# Altium PCB PCB.PcbDoc
Units mm, origin at the board's own origin, x right, y up, seen from the top; angles counter-clockwise.
Board outline 7.24 x 6.35 mm, 2 copper layers (Top Layer, Bottom Layer); 9 components, 8 nets, 33 pads, 0 vias.
Unrouted connection lines stored in the file: 12.
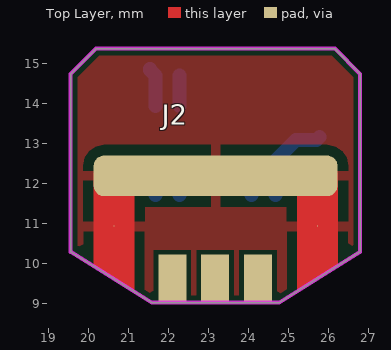
[diagram p0: Top Layer view]
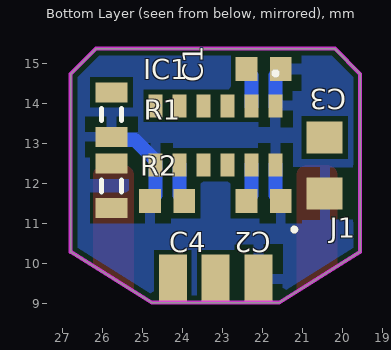
[diagram p1: Bottom Layer view, seen from below]

## Layer stack, top to bottom
Top Solder: solder mask 0.0102, Solder Resist, Dk 3.5
Top Layer: signal copper 0.0356
Dielectric 1: dielectric 0.32, FR-4, Dk 4.8
Bottom Layer: signal copper 0.0356
Bottom Solder: solder mask 0.0102, Solder Resist, Dk 3.5

## Board outline
19.558,10.287 19.558,14.732 20.193,15.367 26.162,15.367 26.797,14.732 26.797,10.287 24.765,9.017 21.59,9.017

## Design rules (kind name [scope] priority, off if disabled: settings)
Clearance [All] p1: gap=0.127 ignorepadtopadclearanceinfootprint=FALSE
PolygonConnect PolygonConnect_3 [All vs IsNamedPolygon('GND_L01_P002')] p1: connectstyle=Relief reliefconductorwidth=0.254 reliefentries=4 polygonreliefangle="90 Angle" airgapwidth=0.254
PolygonConnect PolygonConnect_2 [All vs IsNamedPolygon('GND_L01_P002')] p2: connectstyle=Relief reliefconductorwidth=0.254 reliefentries=4 polygonreliefangle="90 Angle" airgapwidth=0.254
PolygonConnect PolygonConnect_1 [All vs IsNamedPolygon('GND_L01_P002')] p3: connectstyle=Direct reliefconductorwidth=0.254 reliefentries=4 polygonreliefangle="90 Angle" airgapwidth=0.254
PolygonConnect [All] p4: connectstyle=Relief reliefconductorwidth=0.254 reliefentries=4 polygonreliefangle="90 Angle" airgapwidth=0.254
RoutingVias [All] p1: holewidth=0.711 width=1.27 viastyle="Through Hole" minholewidth=0.711 minwidth=1.27 maxholewidth=0.711 maxwidth=1.27
SolderMaskExpansion [All] p1: expansion=0.102 istentingtop=FALSE
SupplyNets "Schematic Supply Nets_1" [InNet('+3V3')] p1: voltage=0.000
SupplyNets "Schematic Supply Nets" [InNet('GND')] p2: voltage=0.000
Width [All] p1: maxlimit=16 minlimit=0.1 preferedwidth=0.254
30 further rules are at their usual default settings.

## Components (designator, comment, footprint, x,y, rotation, side; value= is the part's Value field where it differs from the comment)
C1 "Cap0402" CAP0402 21.971,14.859 r180 bottom value=100nF
C2 "Cap0402" CAP0402 21.971,11.557 r180 bottom value=100nF
C3 "Cap0603" CAP0603 20.447,12.446 r270 bottom value=1uF
C4 "Cap0402" CAP0402 24.384,11.557 r180 bottom value=100nF
IC1 "TMF8806" TMF88051B 23.176,13.2 r0 bottom locked
J1 "TOF_conn" PCBCOMPONENT_1 35.307,11.522 r180 bottom locked
J2 "FC_Mount" FC_MOUNT 20.414,7.881 r0 top
R1 "Res0402" RES0402 25.781,13.716 r90 bottom value=0R
R2 "Res0402" RES0402 25.781,11.938 r90 bottom value=10k

## Footprints (in the part's own frame and the unit in brackets; to place one, negate y for a bottom-side part, rotate by r counter-clockwise, add the part's x,y. Pads: shape width x height; smd on the part's side, far side on the other; paste and mask are expansions set on the pad)
CAP0402 [mm]
  rect 0.54x0.6 smd: 1(-0.43,0) 2(0.43,0)
  body extent -0.5,-0.28 0.5,0.27, height 0.5
CAP0603 [mm]
  rect 0.8x0.9 smd: 1(-0.7,0) 2(0.7,0)
  body extent -0.87,-0.48 0.87,0.48, height 0.55
FC_MOUNT [mil]
  round 1 smd: 1(8.97,120) 1(209.13,120)
  rrect50% 240x40 smd: 1(108.98,169.55)
  Top Layer region: 189.13,56.35 229.13,81.2 229.13,170 228.37,173.83 226.2,177.07 222.96,179.24 219.13,180 219.13,180 199.13,180 195.31,179.24 192.06,177.07 189.9,173.83 189.13,170 189.13,170
  Top Layer region: 28.97,56.35 -11.03,81.2 -11.03,170 -10.27,173.83 -8.11,177.07 -4.86,179.24 -1.03,180 -1.03,180 18.97,180 22.79,179.24 26.04,177.07 28.2,173.83 28.97,170 28.97,170
  body extent -3,-15 222,185, height 28
PCBCOMPONENT_1 [mm]
  rect 0.7x1.2 smd: 1(13.208,-1.903) 2(12.136,-1.903) 3(11.065,-1.903)
  rect 0.7x1.2 smd far side: 4(11.065,-1.903) 5(12.136,-1.903) 6(13.208,-1.903)
  silkscreen extent 14.05,-0.72 14.15,-0.63
RES0402 [mm]
  rect 0.5x0.8 smd: 1(-0.555,-0.005) 2(0.559,-0.005)
  silkscreen extent -0.15,-0.25 0.15,0.25, body extent -0.5,-0.25 0.5,0.25, height 0.4
TMF88051B [mm]
  rect 0.35x0.575 smd: 1(-1.5,-0.738) 2(-0.9,-0.738) 3(-0.3,-0.738) 4(0.3,-0.738) 5(0.9,-0.738) 6(1.5,-0.738) 7(1.5,0.738) 8(0.9,0.738) 9(0.3,0.738) 10(-0.3,0.738) 11(-0.9,0.738) 12(-1.5,0.738)
  silkscreen extent -1.55,-1.6 -1.45,-1.5, body extent -1.8,-1.1 1.8,1.1, height 1.2

## Part data
C1 C2 C4: Voltage=6V3
C3: Voltage=25V
IC1: library part TMF8805-1B, "Integrated Circuit", Manufacturer_Name="ams OSRAM", Mouser Part Number=985-TMF8805-1B, Datasheet Link=https://ams.com/documents/20143/4372629/TMF8805_DS000692_4-00.pdf, Height=1.1mm, Manufacturer_Part_Number=TMF8805-1B, Mouser Price/Stock=https://www.mouser.co.uk/ProductDetail/ams-OSRAM/TMF8805-1B?qs=sPbYRqrBIVlwsjHE%2F%252BrL9g%3D%3D

## Nets (pads, with @x,y where several pads share a name; then routed paths per layer and width w, separated by ;. In a path a pad name is that pad's centre, name@x,y a point inside that pad or via, vN(x,y) a via of type N, cw(c..) or ccw(c..) an arc to the next point about the centre after c; other vN are vias at no path point)
+3V3: C1.2 C2.2 C3.2 C4.1 IC1.1 IC1.7 IC1.12 J1.1 R1.1 | length 3.9
  Bottom Layer w0.35: C1.2 21.541,14.829 21.676,14.694 IC1.1 ; C2.2@21.676,11.706 IC1.12 ; C4.1@24.676,11.706 IC1.7 24.676,12.574 25.187,13.086 25.701,13.086 R1.1
EN: IC1.9 J1.6
GND: C1.1 C2.1 C3.1 C4.2 IC1.2 IC1.8 IC1.11 J2.1 R2.1 | length 2.3
  Bottom Layer w0.35: C2.1@22.276,11.706 IC1.11 ; IC1.2 C1.1@22.276,14.694 ; C4.2@24.076,11.706 IC1.8
GPIO: IC1.10 J1.5 R2.2
INT: IC1.4 J1.2
NetIC1_3: IC1.3 R1.2
SCL: IC1.5 J1.3
SDA: IC1.6 J1.4

## Polygon pours and split planes (outlines as drawn)
+3V3 on Bottom Layer "+3V3_L02_P003" (solid, pour order 3): 19.558,10.287 19.558,14.732 20.193,15.367 26.162,15.367 26.797,14.732 26.797,10.287 24.765,9.017 21.59,9.017
GND on Top Layer "GND_L01_P002" (solid, pour order 2): 19.558,10.287 19.558,14.732 20.193,15.367 26.162,15.367 26.797,14.732 26.797,10.287 24.765,9.017 21.59,9.017

## Keep-outs
Keep-Out Layer:
  the board outline again, w0.1